# EAGLE board tyraka3.0 (EAGLE 9.6.2)
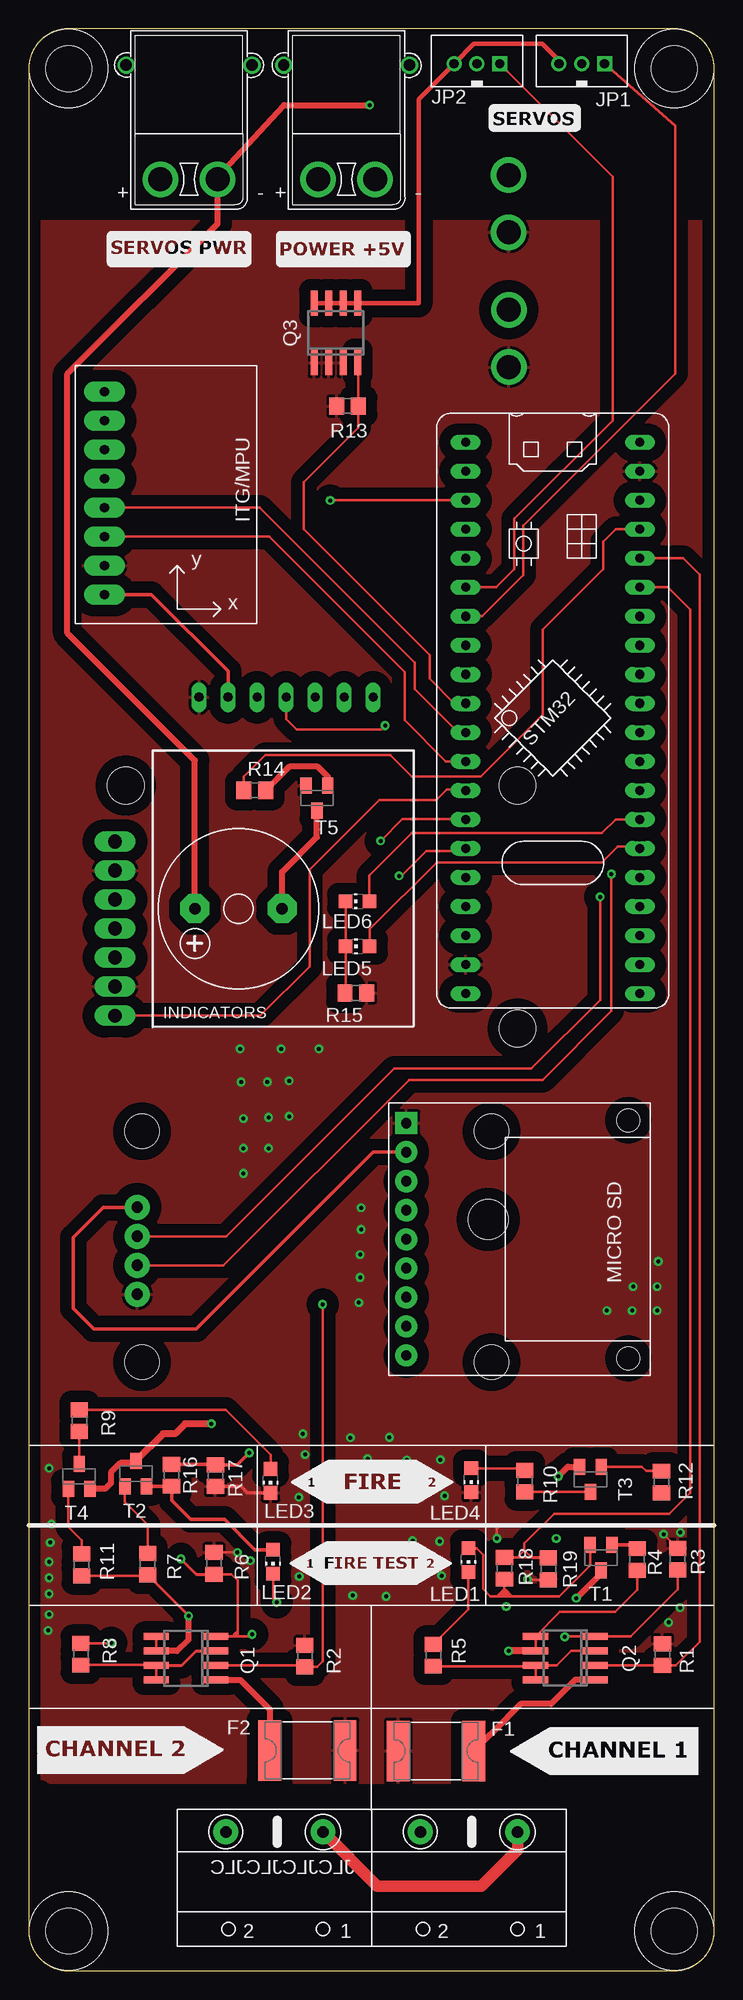
[diagram p0: board, top side]
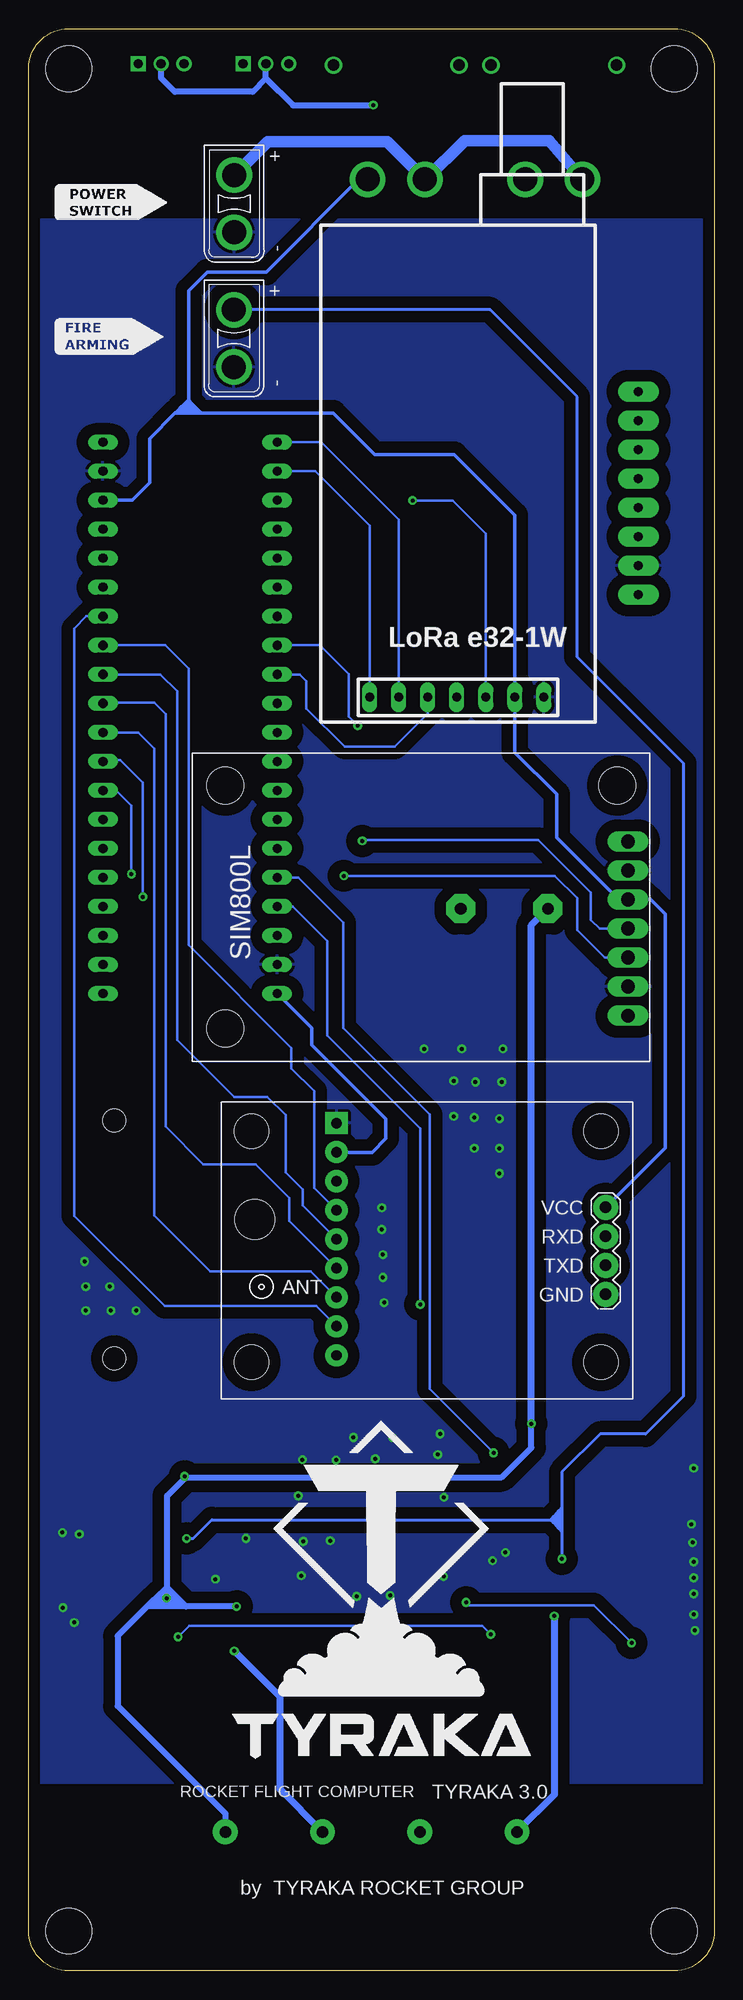
[diagram p1: board, bottom side, seen from below]

Size 60 x 170 mm. Coordinates in mm from the lower left corner, seen from the top.
Outline: 3.5,0 56.5,0 arc90 60,3.5 60,166.5 arc90 56.5,170 3.5,170 arc90 0,166.5 0,3.5 arc90 3.5,0
Copper layers (1*16): Top 0.035mm / dielectric 1.5mm / Bottom 0.035mm
Design rules "default *": minimum track width 6mil, minimum drill 0.35mm, track to track 6mil, track to pad 6mil, pad to pad 6mil, via to via 6mil, smd to smd 6mil, copper to edge 40mil, drill to drill 6mil, minimum pad ring 10mil, minimum via ring 8mil, stop-mask expansion 4mil, vias tented up to drill 14mil, thermal gap 10mil
Holes 4 mm at 3.5,3.5 56.5,3.5 3.5,166.5 56.5,166.5
tRestrict: 21 lines
bRestrict: 12 lines

## Footprints (pad centres in the part's own frame; a part is rotated, then mirrored left to right if it is on the bottom)
2920L = smd 2 x 5.3: 1 -3.3,0; 2 3.3,0
B3B-PH-K-S = drill 0.813 square: 1 2,0 | drill 0.813: 2 0,0; 3 -2,0
CHIP-LED0805 = smd 1.2 x 1.2: A 0,-1.05; C 0,1.05
SO-08 = smd 0.6 x 2.2: 1 -1.905,-2.6; 2 -0.635,-2.6; 3 0.635,-2.6; 4 1.905,-2.6; 5 1.905,2.6; 6 0.635,2.6; 7 -0.635,2.6; 8 -1.905,2.6
R0805 = smd 1.3 x 1.5: 1 -0.95,0; 2 0.95,0
MICRO_SD = drill 0.9 pad 1.93 square: P1 -9.906,10.16 | drill 0.9 pad 1.93: P2 -9.906,7.62; P3 -9.906,5.08; P4 -9.906,2.54; P5 -9.906,0; P6 -9.906,-2.54; P7 -9.906,-5.08; P8 -9.906,-7.62; P9 -9.906,-10.16 | hole 2: 9.525,-10.414; 9.525,10.414
F/CM12P = drill 1.016 pad 2.54 octagon: + 3.81,0; - -3.81,0
SOT23 = smd 1 x 1.4: 1 -0.95,-1.1; 2 0.95,-1.1; 3 0,1.1
SOT23-BEC = smd 1 x 1.4: B -0.95,-1.1; C 0,1.1; E 0.95,-1.1
GY-521 = drill 0.8 pad 1.778 long: ADO -2.54,6.35; GND -2.54,-6.35; INT -2.54,8.89; SCL -2.54,-3.81; SDA -2.54,-1.27; VCC -2.54,-8.89; XCL -2.54,3.81; XDA -2.54,1.27
SIP = drill 1.2 long: 1 38.1,19.24; 2 38.1,16.7; 3 38.1,14.16; 4 38.1,11.62; 5 38.1,9.08; 6 38.1,6.54; 7 38.1,4 | hole 3.2: 2.87,24.13; 2.87,2.87; 37.16,24.13
LORA_E32 = drill 0.8 long: AUX 1.69,9.56; GND 1.69,4.48; M0 1.69,19.72; M1 1.69,17.18; RX 1.69,14.64; TX 1.69,12.1; VCC 1.69,7.02
BLUE_PILL = drill 0.8 long: 3.3V1 -7.62,-33.02; 3V3 7.62,10.16; 5V -7.62,-27.94; 5V1 7.62,15.24; GND 7.62,12.7; GND2 -7.62,-30.48; NRST 7.62,-22.86; PA0 7.62,-20.32; PA1 7.62,-17.78; PA2 7.62,-15.24; PA3 7.62,-12.7; PA4 7.62,-10.16; PA5 7.62,-7.62; PA6 7.62,-5.08; PA7 7.62,-2.54; PA8 -7.62,5.08; PA9 -7.62,2.54; PA10 -7.62,0; PA11 -7.62,-2.54; PA12 -7.62,-5.08; PA15 -7.62,-7.62; PB0 7.62,0; PB1 7.62,2.54; PB2 7.62,5.08; PB3 -7.62,-10.16; PB4 -7.62,-12.7; PB5 -7.62,-15.24; PB6 -7.62,-17.78; PB7 -7.62,-20.32; PB8 -7.62,-22.86; PB9 -7.62,-25.4; PB10 7.62,7.62; PB12 -7.62,15.24; PB13 -7.62,12.7; PB14 -7.62,10.16; PB15 -7.62,7.62; PC13 7.62,-30.48; PC14 7.62,-27.94; PC15 7.62,-25.4; VBAT 7.62,-33.02
GPS-RECEIVER-NEO6M = drill 1 pad 2.184: GND -15.63,3.844; RX -15.63,-1.236; TX -15.63,1.304; VCC -15.63,-3.776 | hole 3: -15.226,9.796; -15.226,-10.431; 15.353,-10.431; 15.353,9.796 | hole 3.5: 15.083,-2.715
XT60_MALE_90 = drill 2.1: P$1 0,0; P$2 5,0 | drill 1: P$3 -3,10; P$4 8,10
4XZLACZESRUBOWE = drill 1 pad 2.184: P$1 4.25,2; P$2 12.75,2; P$3 21.268,2; P$4 29.768,2
XT30UPB-M = drill 2.1: P$1 0,0; P$2 5,0

## Placement (x,y rotation side)
F1  2920L030  [2920L]  35.66,19.25 180 top
F2  2920L030  [2920L]  24.39,19.3 0 top
JP1  3PIN  [B3B-PH-K-S]  48.4,166.92 0 top
JP2  3PIN  [B3B-PH-K-S]  39.23,166.92 0 top
LED1  [CHIP-LED0805]  38.49,35.95 180 top
LED2  [CHIP-LED0805]  21.39,35.81 180 top
LED3  [CHIP-LED0805]  21.18,42.89 180 top
LED4  [CHIP-LED0805]  38.73,42.95 180 top
LED5  [CHIP-LED0805]  28.79,89.68 90 top
LED6  [CHIP-LED0805]  28.78,93.63 90 top
Q1  IRF8313P  [SO-08]  13.78,27.37 90 top
Q2  IRF8313P  [SO-08]  46.96,27.39 90 top
Q3  [SO-08]  26.89,143.37 0 top
R1  33k  [R0805]  55.47,27.69 270 top
R2  33k  [R0805]  24.17,27.55 270 top
R3  33k  [R0805]  56.8,36.04 270 top
R4  1k  [R0805]  53.26,36.01 270 top
R5  1k  [R0805]  35.42,27.63 90 top
R6  33k  [R0805]  16.23,35.67 270 top
R7  1k  [R0805]  10.42,35.6 270 top
R8  1k  [R0805]  4.57,27.72 90 top
R9  1k  [R0805]  4.45,48.16 270 top
R10  1k  [R0805]  43.42,42.88 270 top
R11  10k  [R0805]  4.65,35.54 90 top
R12  10k  [R0805]  55.38,42.8 90 top
R13  10k  [R0805]  27.91,136.96 0 top
R14  1k  [R0805]  19.79,103.33 0 top
R15  1k  [R0805]  28.64,85.59 180 top
R16  1k  [R0805]  12.51,43.38 90 top
R17  1k  [R0805]  16.35,43.35 270 top
R18  1k  [R0805]  41.64,35.25 90 top
R19  1k  [R0805]  45.48,35.19 90 top
SD1  MICRO_SD  [MICRO_SD]  42.96,64.04 0 top
SG1  F/CM12P  [F/CM12P]  18.37,92.97 180 top
T1  BC846  [SOT23]  50.09,36.17 180 top
T2  BC846  [SOT23]  9.38,43.52 0 top
T3  [SOT23-BEC]  49.16,43.02 180 top
T4  [SOT23-BEC]  4.43,43.3 0 top
T5  [SOT23-BEC]  25.23,102.64 180 top
U2  GY-521MPU6050  [GY-521]  9.18,129.34 0 top
U$1  SIM800L  [SIP]  45.66,79.61 0 bottom
U$2  LORA_E32  [LORA_E32]  10.43,109.79 90 bottom
U$3  [BLUE_PILL]  45.87,118.56 0 top
U$4  GPS_TYRAKA  [GPS-RECEIVER-NEO6M]  25.14,63.06 180 bottom
U$5  XT30_MALE_90  [XT60_MALE_90]  11.54,156.8 0 top
U$6  XT30_MALE_90  [XT60_MALE_90]  25.33,156.79 0 top
U$7  4X_ARK_8.5MM  [4XZLACZESRUBOWE]  47.03,14.16 180 top
U$8  XT30UPB-M  [XT30UPB-M]  42.03,145.39 270 bottom
U$9  XT30UPB-M  [XT30UPB-M]  42.01,157.17 270 bottom

## Library data of the parts
F1 F2 = polyfuse-smd_10 (1); MF: Littelfuse; MPN: 2920L030; OC_FARNELL: 1822222; OC_NEWARK: 18M4789
JP1 JP2 = jst_eph
LED1-LED6 = led
Q1-Q3 = transistor-power
R1-R19 = rcl; SPICEPREFIX: R
SD1 = 111_microsd
SG1 = buzzer; OC_FARNELL: unknown; OC_NEWARK: unknown
T1 T2 = transistor-neu-to92
T3-T5 = transistor
U2 = 111_gy-521
U$1 = SIM800L
U$2 = 111_LoRa_e32
U$3 = BluePill
U$4 = 111_gps_tyraka
U$5 U$6 U$8 U$9 = XT60PW-M
U$7 = 111_ark_8.5mm

## Nets
5V1: U$3.5V1
+3V3: SD1.P2 U2.VCC U$1.3 U$2.VCC U$3.3.3V1 U$3.3V3 U$4.VCC U$6.P$2
AUX: U$2.AUX U$3.PB14
BUZZER: R14.1 U$3.PB10
CD_SD: SD1.P8 U$3.PB0
CHANELL_1: R12.1
CHANNEL_1: Q2.5 Q2.6 R4.2 U$7.P$2
CHANNEL_2: Q1.5 Q1.6 R7.2 R11.1 U$7.P$4
CLK: SD1.P6 U$3.PA5
CS_SD: SD1.P7 U$3.PA4
FIRE_CHANNEL_1_EN: Q2.2 R1.2 U$3.PB2
FIRE_CHANNEL_1_TEST: R18.2 R19.2 U$3.PB1
FIRE_CHANNEL_2_EN: Q1.2 R2.2 U$3.PB9
FIRE_CHANNEL_2_TEST: R16.2 R17.1 U$3.PB8
FIRE_CHANNEL_ARMING: Q1.4 Q2.4 R3.2 R6.2 U$8.P$1
GND: F1.2 F2.2 LED3.C LED4.C Q3.1 Q3.2 Q3.3 R1.1 R2.1 R3.1 R6.1 R13.1 R15.1 R17.2 R19.1 SD1.P1 T5.E U2.GND U$1.2 U$1.6 U$2.GND U$3.GND U$3.GND2 U$4.GND U$8.P$2 U$9.P$2
LED1: LED5.A U$3.PA0
LED2: LED6.A U$3.PA1
M0: U$2.M0 U$3.PB13
M1: U$2.M1 U$3.PB12
MISO: SD1.P5 U$3.PA6
MOSI: SD1.P4 U$3.PA7
N$1: F1.1 Q2.1
N$2: F2.1 Q1.1
N$3: Q2.3 Q2.7 Q2.8 R5.1
N$4: Q1.3 Q1.7 Q1.8 R8.1
N$5: LED1.C R5.2
N$6: SG1.- T5.C
N$7: LED2.C R8.2
N$8: R14.2 T5.B
N$9: R4.1 T1.1
N$10: R7.1 T2.1
N$11: R12.2 T3.B
N$12: R10.2 T3.C
N$13: LED4.A R10.1
N$14: LED5.C LED6.C R15.2
N$15: LED2.A R16.1 T2.2
N$16: R9.2 T4.C
N$17: LED3.A R9.1
N$18: R11.2 T4.B
N$19: JP1.3 JP2.3 Q3.5 Q3.6 Q3.7 Q3.8
N$20: LED1.A R18.1 T1.2
RST_SIM: U$1.7 U$3.PB5
RX_GPS: U$3.PA3 U$4.RX
RX_LORA: U$2.RX U$3.PA12
RX_SIM: U$1.5 U$3.PB7
SCL: U2.SCL U$3.PB4
SCREW_SWITCH_GND: U$5.P$1 U$6.P$1 U$9.P$1
SDA: U2.SDA U$3.PB3
SERVO_1: JP2.1 U$3.PA9
SERVO_2: JP1.1 U$3.PA10
SERVO_PWR: Q3.4 R13.2 U$3.PA15
TX_GPS: U$3.PA2 U$4.TX
TX_LORA: U$2.TX U$3.PA11
TX_SIM: U$1.4 U$3.PB6
V+: JP1.2 JP2.2 SG1.+ T1.3 T2.3 T3.E T4.E U$5.P$2 U$7.P$1 U$7.P$3

## Tracks (layer width: path | path; a pad name or v marks a point on that pad's centre or on a via)
+3V3
  Top 0.305: U2.VCC 10.75,120.45 17.45,113.75 U$2.VCC | U$4.VCC 6.54,66.84 3.9,64.2 3.9,58 5.7,56.2 14.68,56.2 30.14,71.66 SD1.P2
  Bottom 0.305: U$3.3.3V1 35.22,82.51 35.22,81.06 28.74,74.58 28.74,72.84 29.95,71.63 33.02,71.63 SD1.P2 | U$6.P$2 31.1,156.79 39.21,148.68 44.37,148.68 45.99,147.06 45.99,137.52 | U$3.3V3 50.92,128.72 49.38,130.26 49.38,134.13 47.19,136.32 | 44.85,136.32 33.33,136.32 29.73,132.72 22.77,132.72 17.45,127.41 U$2.VCC 17.45,106.66 13.8,103 13.8,99.2 8.37,93.77 U$1.3 7.53,93.8 5.6,93.8 4.3,92.5 4.3,72.05 U$4.VCC | 44.85,136.32 47.19,136.32 | 47.19,136.32 46.89,136.62 | 46.89,136.62 46.66,136.84 | 46.66,136.84 46.4,137.12 | 46.34,137.18 45.99,137.52 | 45.99,137.52 45.99,137.46 45.7,137.18 | 45.7,137.18 45.54,137.01 | 45.54,137.01 45.41,136.88 | 45.41,136.88 45.15,136.62 | 45.15,136.62 44.85,136.32 | 45.15,136.62 46.89,136.62 | 46.66,136.84 45.44,136.84 45.41,136.88 | 45.7,137.18 46.34,137.18 | 46.34,137.18 46.4,137.12 | 46.4,137.12 46.29,137.01 45.54,137.01
AUX  (via drill 0.35)
  Top 0.203: U$3.PB14 26.42,128.72 v26.4,128.7
  Bottom 0.203: v26.4,128.7 22.9,128.7 20,125.8 U$2.AUX
BUZZER
  Top 0.203: R14.1 18.84,104.54 20.7,106.4 31.65,106.4 33.53,104.52 39.56,104.52 45,109.96 45,117.39 50.29,122.68 50.29,125.1 51.38,126.18 U$3.PB10
CD_SD
  Bottom 0.203: SD1.P8 34.83,58.2 48.1,58.2 56,66.1 56,117.5 54.94,118.56 U$3.PB0
CHANNEL_1  (via drill 0.35)
  Top 0.203: Q2.6 Q2.5 46.48,31.41 51.33,31.41 53.26,33.34 R4.2
  Top 0.254: Q2.6 44.34,28
  Top 0.61: 44.34,28 v42,28
  Bottom 0.61: U$7.P$2 38,15.88 38,24 v42,28
CHANNEL_2  (via drill 0.35)
  Top 0.203: R11.1 10.35,34.59 R7.2 | Q1.6 Q1.5
  Top 0.254: R7.2 v14,31.07
  Top 0.508: Q1.6 13.01,28 14,29 v14,31.07
  Bottom 0.61: U$7.P$4 14,15.43 v14,31.07
CLK
  Bottom 0.203: SD1.P6 37.18,65.63 37.18,67.65 40.13,70.6 44.7,70.6 48,73.9 48,110 49,111 53.43,111 U$3.PA5
CS_SD
  Bottom 0.203: SD1.P7 35.33,61.23 44.1,61.23 49,66.13 49,107 50.4,108.4 U$3.PA4
FIRE_CHANNEL_1_EN
  Top 0.203: Q2.2 49.57,26.74 R1.2 56.65,26.74 58.71,28.8 58.71,122.2 57.27,123.64 U$3.PB2
FIRE_CHANNEL_1_TEST
  Top 0.203: U$3.PB1 55.94,121.1 57.9,119.14 57.9,41.85 56.07,40.02 45.99,40.02 43.38,37.41 43.38,36.81 | 43.38,36.81 42.77,36.2 R18.2 45.42,36.2 R19.2 44.05,36.14 43.38,36.81
FIRE_CHANNEL_2_EN  (via drill 0.35)
  Top 0.203: Q1.2 24.04,26.73 R2.2 25.25,26.6 25.73,27.08 v25.73,58.34
  Bottom 0.203: v25.73,58.34 25.73,73.73 33.89,81.89 33.89,90.15 36.9,93.16 U$3.PB9
FIRE_CHANNEL_2_TEST  (via drill 0.35)
  Top 0.305: v19.31,45.34 18.27,44.3 R17.1 16.32,44.33 R16.2
  Bottom 0.203: U$3.PB8 36.39,95.7 32.44,91.75 32.44,82.53 24.89,74.98 24.89,50.92 v19.31,45.34
FIRE_CHANNEL_ARMING  (via drill 0.35)
  Top 0.203: Q1.4 17.84,29.27 | 17.84,29.27 18.11,29.54 | 18.11,29.54 18.29,29.72 | 18.29,29.72 18.29,34.16 17.73,34.72 R6.2 | R3.2 56.8,33.4 52.69,29.29 Q2.4 46.97,29.29 v46.92,29.24 | v19.56,29.46 19.37,29.27 18.27,29.27 | 18.27,29.27 18.15,29.27 | 18.15,29.27 17.84,29.27 | 18.29,29.72 18.29,29.29 18.27,29.27 | 18.15,29.27 18.15,29.49 18.11,29.54
  Top 0.254: v13.34,36.07 14.68,34.72 R6.2
  Bottom 0.203: v19.56,29.46 20.31,30.22 45.93,30.22 v46.92,29.24
  Bottom 0.254: 13.34,40.51 13.34,43.66 10,47 6,47 2.7,50.3 2.7,105.7 12,115 12,137.77 19.62,145.39 U$8.P$1 | 13.34,40.51 13.34,38.49 | 13.34,38.49 v13.34,36.07 | v46.17,37.85 45.6,37.85 43.95,39.5 14.35,39.5 | 13.34,40.51 13.53,40.32 | 13.53,40.32 13.6,40.25 | 13.6,40.25 13.84,40 | 13.84,40 14.1,39.75 | 14.1,39.75 14.35,39.5 | 14.35,39.5 14.1,39.24 | 14.1,39.24 13.84,38.99 | 13.84,38.99 13.6,38.75 | 13.6,38.75 13.53,38.67 | 13.53,38.67 13.34,38.49 | 13.6,38.75 13.6,40.25 | 13.84,38.99 13.84,40 | 14.1,39.24 14.1,39.75 | 13.53,40.32 13.53,38.67
GND  (via drill 0.35)
  Top 0.203: 18.3,36.6 v18.28,36.62 R6.1 | R3.1 v55.57,38.22 | v40.98,37.86 40.98,38.74 41.04,38.8 | R19.1 43.7,34.24 v43.65,34.29
  Top 0.305: 21.06,41.96 LED3.C 19.15,41.84 18.59,42.4 R17.2
  Bottom 0.203: v43.65,34.29 43.68,34.29
  other vias: 29.1,66.8 29.1,64.9 29,62.7 29,60.7 28.9,58.5 55,57.8 52.8,57.8 55.1,62.1 55,59.9 18.8,69.8 18.8,72 18.8,74.6 23.66,41.46 24.2,45.2 24,47 19.4,35.9 2,39.1 1.9,37.5 1.8,35.8 1.8,34.4 1.8,33 1.8,31.2 1.7,29.8 1.8,44 28.16,46.66 31.57,46.7 33.6,37.66 35.96,37.6 28.36,32.86 31.28,32.78 56,30.5 57,31.8 50.6,57.8 52.9,59.9 21,72 21,74.7 22.8,74.8 20.9,77.8 18.6,77.8 22.8,77.9 18.5,80.7 22.1,80.7 25.4,80.7 23.68,34.52 36.14,34.6 36.4,41.58 36.04,44.74 33.09,44.71 29.67,44.81 57.04,38.37
  pour Bottom (isolate 1.016): 0.1,169.9 0.1,0.1 0,0 60,0 60,170 0.2,170
  pour Top (isolate 1.016): 0,169.9 59.9,169.9 59.9,0.2 60,0.1 0.2,0.1 0,-0.1
LED1
  Top 0.203: LED5.A 29.84,91.17 35.7,97.03 50.16,97.03 51.56,98.43 53.3,98.43 U$3.PA0
LED2
  Top 0.203: LED6.A 29.83,95.88 33.52,99.57 50.16,99.57 51.38,100.78 U$3.PA1
M0
  Bottom 0.203: U$3.PB13 34.9,131.26 30.16,126.52 U$2.M0
M1
  Bottom 0.203: U$3.PB12 35.1,133.8 34.9,133.8 34.4,133.8 27.61,127.02 U$2.M1
MISO
  Bottom 0.203: U$3.PA6 48.48,113.48 47,112 47,81.5 42,76.5 39.1,76.5 37.5,74.9 37.5,74.6 37.5,69.9 36,68.4 36,66.99 SD1.P5
MOSI
  Bottom 0.203: SD1.P4 35,68.53 35,77 37,79 37,80.8 46,89.8 46,114 48.02,116.02 U$3.PA7
N$1
  Top 0.508: Q2.1 47.84,25.48 45.72,23.37 43.05,23.37 41.91,22.23 41.91,22.2 F1.1
N$2
  Top 0.508: Q1.1 18.54,25.46 21.09,22.91 F2.1
N$3
  Top 0.203: Q2.7 44.28,26.68 R5.1 | Q2.8 Q2.7 | 49.48,27.94 Q2.3 47.49,28.02 46.22,26.75 Q2.7
  Top 0.254: Q2.7 45.13,26.75 45.21,26.67
N$4
  Top 0.203: R8.1 11.14,26.77 Q1.7 Q1.8
  Top 0.254: Q1.7 13.4,26.73 14.67,28 Q1.3
N$5
  Top 0.203: LED1.C 38.49,31.65 R5.2
N$6
  Top 0.508: SG1.- 22.18,96.18 25.23,99.23 25.23,99.9 T5.C
N$7  (via drill 0.35)
  Top 0.203: R8.2 7.08,28.67 7.11,28.7 v7.24,28.7 | v21.72,32.26 21.39,32.59 LED2.C
  Bottom 0.203: v7.24,28.7 10.54,32 21.46,32 v21.72,32.26
N$8
  Top 0.508: R14.2 21.8,104.39 22.81,105.4 25.3,105.4 26.18,104.52 T5.B
N$9
  Top 0.203: T1.1 51.25,37.48
  Top 0.305: T1.1 52.94,37.27 R4.1
N$10
  Top 0.203: T2.1 8.43,41.04 10.42,39.06 R7.1
N$11
  Top 0.203: T3.B 53.67,44.12 54.04,43.75 R12.2
N$12
  Top 0.203: R10.2 T3.C
N$13
  Top 0.203: LED4.A 43.24,44 R10.1
N$14
  Top 0.203: R15.2 27.74,85.64 LED5.C LED6.C
N$15
  Top 0.305: 12.51,42.39 12.51,41.19 14.19,39.51 17.16,39.51 19.8,36.87 LED2.A | 12.51,42.39 R16.1 | T2.2 12.48,42.42 12.51,42.39
N$16
  Top 0.203: R9.2 4.43,47.2 T4.C
N$17
  Top 0.203: R9.1 4.46,49.1 17.24,49.1 21.18,45.16 LED3.A
N$18
  Top 0.203: T4.B 3.45,42.17 3.45,38.89 4.65,37.69 R11.2
N$19
  Top 0.406: JP1.3 46.71,166.92 44.97,168.66 38.97,168.66 JP2.3 34.13,163.82 34.13,145.97 Q3.5 Q3.6 Q3.7 Q3.8
N$20
  Top 0.203: LED1.A 39.2,37 39.8,36.41 39.78,36.39 39.78,33.42 40.41,32.79 40.98,32.79 | 40.98,32.79 41.19,32.79 | 41.19,32.79 41.61,32.79 | 41.61,32.79 42,32.79 | 42,32.79 42.3,32.79 | 42.3,32.79 46.44,32.79 49.14,35.49 T1.2 | R18.1 41.64,33.45 | 41.64,33.45 41.64,33.21 | 41.64,33.09 41.64,32.82 | 41.64,32.82 41.61,32.79 | 42.3,32.79 42.16,32.92 | 42.16,32.92 41.84,33.26 | 41.84,33.26 41.64,33.45 | 41.64,33.45 40.98,32.79 | 41.19,32.79 41.43,33.03 | 41.43,33.03 41.61,33.21 41.64,33.21 | 42.16,32.92 41.8,32.92 41.64,33.09 | 41.64,33.09 41.64,33.21 | 42,32.79 41.84,32.95 41.84,33.26 | 41.64,32.82 41.43,33.03
RST_SIM
  Top 0.203: U$1.7 20.28,83.61 24.59,87.92 24.59,96.38 30.7,102.49 35.69,102.49 36.58,103.38 38.19,103.38 U$3.PB5
RX_GPS  (via drill 0.35)
  Top 0.203: U$4.RX 17.3,64.3 32,79 44,79 50,85 v50,94
  Bottom 0.203: v50,94 50,104 52,106 53.35,106 U$3.PA3
RX_LORA
  Bottom 0.203: U$2.RX 25.07,110.03 27.97,107.14 32.34,107.14 35.7,110.5 35.7,112.9 36.28,113.48 U$3.PA12
RX_SIM  (via drill 0.35)
  Top 0.203: U$3.PB7 38.01,98 34.78,98 32.63,95.85 v32.41,95.85
  Bottom 0.203: v32.41,95.85 13.95,95.85 12,93.9 12,91.1 9.6,88.7 U$1.5
SCL
  Top 0.203: U$3.PB4 36.5,105.86 32.9,109.46 32.9,113.7 21.07,125.53 U2.SCL
SCREW_SWITCH_GND
  Bottom 1.016: U$9.P$1 39.08,160.1 28.63,160.1 U$6.P$1 25.25,156.79 21.84,160.2 14.44,160.2 U$5.P$1
SDA
  Top 0.203: U$3.PB3 37.6,108.4 33.8,112.2 33.8,114.5 20.23,128.07 U2.SDA
SERVO_1
  Top 0.203: JP2.1 51.1,157.05 51.1,135.7 42.5,127.1 42.5,122.7 40.9,121.1 U$3.PA9
SERVO_2
  Top 0.203: JP1.1 56.58,161.49 56.58,139.81 43.29,126.52 43.29,122.16 39.69,118.56 U$3.PA10
SERVO_PWR
  Top 0.203: Q3.4 28.86,140.7 R13.2 28.86,135.08 24.06,130.28 24.06,126.2 35.1,115.16 35.1,113.1 37.26,110.94 U$3.PA15
TX_GPS  (via drill 0.35)
  Top 0.203: U$4.TX 17.06,61.76 33.3,78 45,78 51,84 v51,96
  Bottom 0.203: v51,96 51,102 52.32,103.32 U$3.PA2
TX_LORA  (via drill 0.35)
  Top 0.203: U$2.TX 22.54,109.56 23.45,108.65 30.85,108.65 v31.2,109
  Bottom 0.203: v31.2,109 32,109.8 32,113.5 34.52,116.02 U$3.PA11
TX_SIM  (via drill 0.35)
  Top 0.203: v30.8,98.9 32.7,100.8 38.23,100.8 U$3.PB6
  Bottom 0.203: v30.8,98.9 30.7,99 15.4,99 10.8,94.4 10.8,92 10.03,91.23 U$1.4
V+  (via drill 0.35)
  Top 0.508: v29.84,163.3 22.33,163.3 16.54,157.03 U$5.P$2 16.54,152.91 3.4,139.78 3.4,117.1 14.56,105.94 SG1.+ | v46.35,43.29 47.18,44.12 T3.E | T2.3 9.22,44.46 8.04,44.46 7.2,43.62 7.2,42.69 6.71,42.2 T4.E | T1.3 50.09,34.79 v47.92,32.62
  Top 0.61: v16,47.9 13.69,47.9 12.81,47.02 11.78,47.02 T2.3
  Top 1.016: U$7.P$3 30.53,7.4 39.6,7.4 42.78,10.58 U$7.P$1
  Bottom 0.508: 39.23,165.64 JP2.2 | 39.23,165.64 40.4,164.47 47.2,164.47 48.4,165.67 JP1.2 | v29.84,163.3 29.87,163.27 36.86,163.27 39.23,165.64 | U$7.P$1 42.78,13.78 52.2,23.2 52.2,29.31 49.61,31.9 | v41.8,31.9 46.23,31.9 | 46.23,31.9 49.61,31.9 | v46.35,43.29 46.26,43.2 | 46.26,43.2 18.6,43.2 16,45.8 v16,47.9 | 47.88,33.63 47.88,41.58 46.26,43.2 | 47.88,33.63 49.01,32.51 | 49.01,32.51 49.61,31.9 | 47.88,33.63 47.88,33.55 | 47.88,33.55 47.63,33.3 | 47.63,33.3 47.24,32.91 | 46.72,32.39 47.24,32.91 | 46.72,32.39 46.23,31.9 | 46.72,32.39 47.97,32.39 | 47.97,32.39 48.15,32.39 | 48.15,32.39 48.57,32.39 | 48.57,32.39 48.89,32.39 49.01,32.51 | 47.24,32.91 47.45,32.91 47.97,32.39 | 47.63,33.3 47.63,32.91 v47.92,32.62 48.15,32.39 | 47.88,33.55 47.88,33.08 48.57,32.39
  Bottom 0.61: v16,47.9 16,91.53 SG1.+

## Text on the board
tPlace: INDICATORS | JLCJLCJLCJLC
bPlace: TYRAKA 3.0 | ROCKET FLIGHT COMPUTER | by TYRAKA ROCKET GROUP